# Altium PCB ZynQRF.PcbDoc (part 2 of 2)
Units mm, origin at the board's own origin, x right, y up, seen from the top; angles counter-clockwise.
Board outline 152.4 x 101.6 mm, 6 copper layers (Top Layer, Int1 (GND), Int2 (Sign), Int3 (Sign), Int4 (PWR), Bottom Layer), stack 1.551 mm thick; 211 components, 269 nets, 1177 pads, 225 vias.
Unrouted connection lines stored in the file: 758.
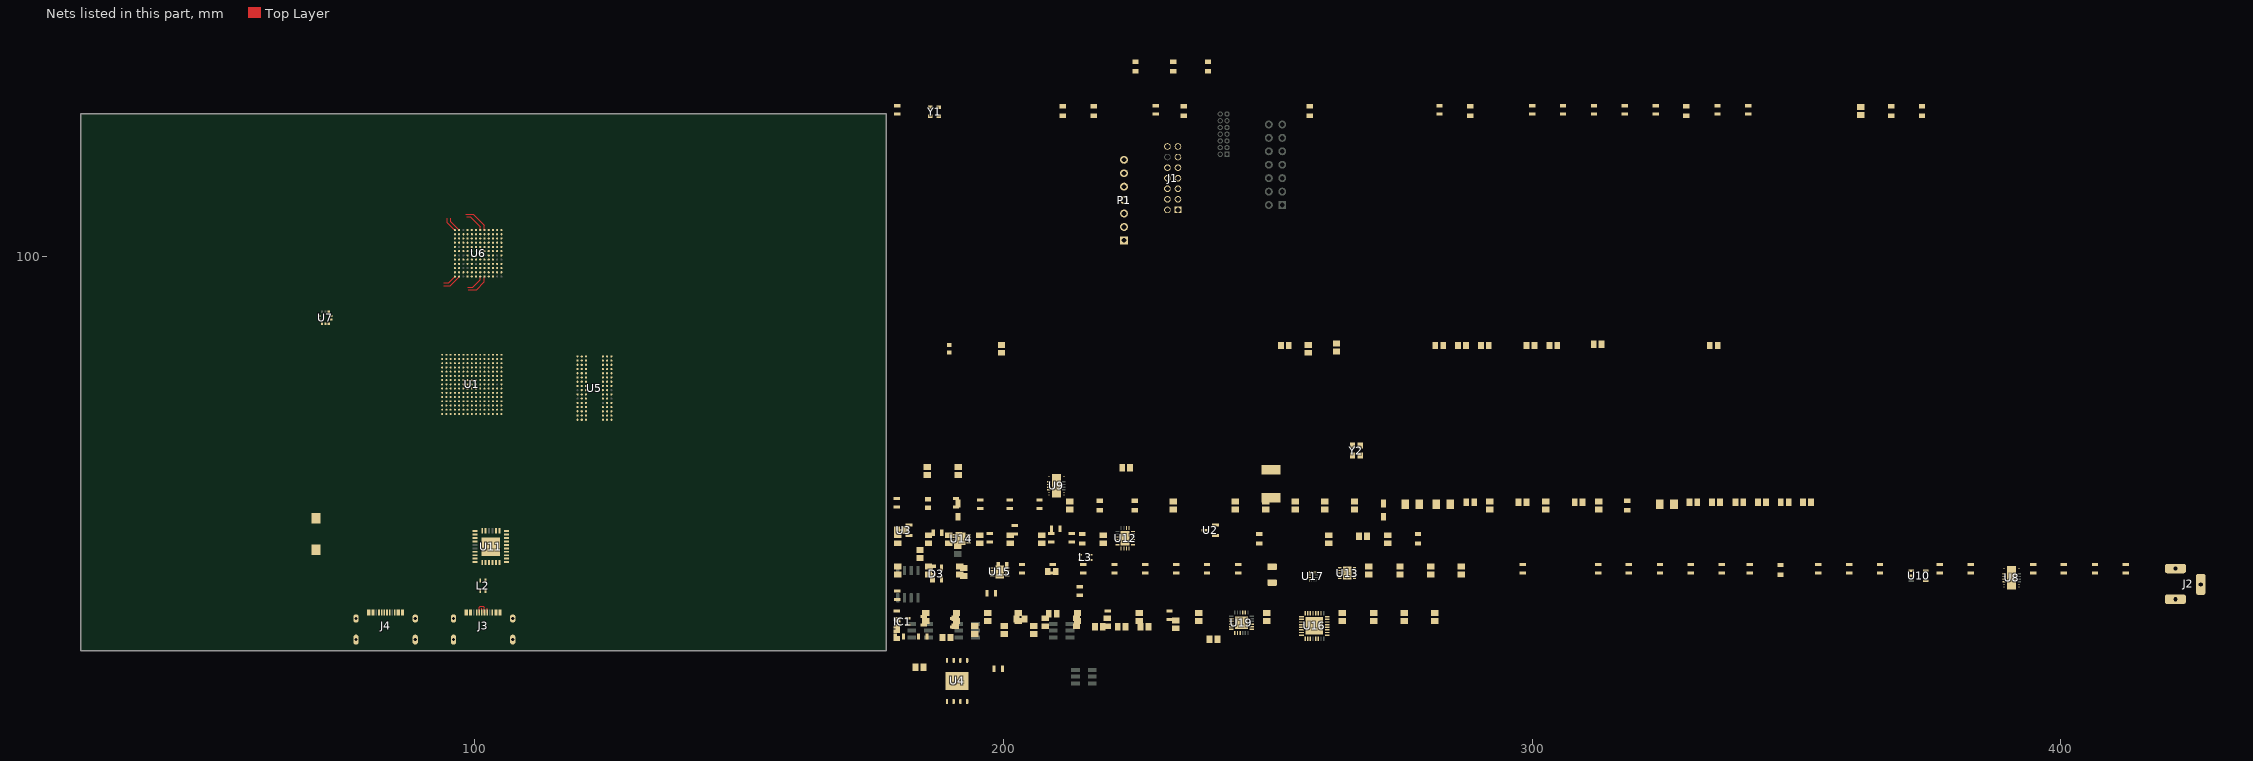
[diagram p4: the nets of this part, all layers, seen from the top]

## Part data
C1 C2 C3 C4 C5 C6 C8 C9 C10 C11 C12 C13 C16 C17 C18 C19 C20 C21 C22 C23 C24 C25 C26 C27 C28 C29 C31 C32 C33 C34 C35 C36 C37 C38 C39 C40 C43 C51 C52 C54 C55 C56 C57 C58 C59 C62 C65 C69 C70 C71 C72 C73 C74 C75 C76 C77 C78 C79 C80 C81 C82 C83 C84 C85 C86 C87 C88 C89: "Polarized Capacitor (Surface Mount)", LatestRevisionDate=29-May-2009, LatestRevisionNote="IPC-7351 Footprint Added.", PackageDescription="Chip Capacitor", PackageReference=C0805, Published=8-Jun-2000, Publisher="Altium Limited"
C7 C14 C15: "100 ÂµF Â±20% 10V Ceramic Capacitor X5R 1206 (3216 Metric)", Package="3216 TDK", Check_prices=https://www.snapeda.com/parts/C3216X5R1A107M160AC/TDK/view-part/?ref=eda, Digi-Key_Part_Number=445-6007-1-ND, MF=TDK, MP=C3216X5R1A107M160AC, Purchase-URL=https://pricing.snapeda.com/search/part/C3216X5R1A107M160AC/?ref=eda, SnapEDA_Link=https://www.snapeda.com/parts/C3216X5R1A107M160AC/TDK/view-part/?ref=snap
C30 C41 C44 C45 C46 C47 C48 C49 C50 C60 C61 C63 C64 C66 C67 C68: library part "Cap Pol3", "Polarized Capacitor (Surface Mount)", LatestRevisionDate=29-May-2009, LatestRevisionNote="IPC-7351 Footprint Added.", PackageDescription="Chip Capacitor", PackageReference=C0805, Published=8-Jun-2000, Publisher="Altium Limited"
C42 C53: library part "Cap Semi", "Capacitor (Semiconductor SIM Model)", LatestRevisionDate=29-May-2009, LatestRevisionNote="IPC-7351 Footprint Added.", PackageDescription="Chip Capacitor", PackageReference=C1206, Published=8-Jun-2000, Publisher="Altium Limited"
D1 D2 J1 J3 J4 U19 Y1: Package=None, Availability=Unavailable, Price=None
  D1 D2: MP=LTST-S220TBKT
  J1: MP=MTMM-107-03-G-D-190
  J3 J4: MF="{'manufacturer': u'Same Sky'}", MP=UJ20-C-H-C-MSMT-TR
  U19: MP=CP2102N-A02-GQFN24R
  Y1: MP=ASDMB-33.000MHZ-LY-T
D3: "ESD Suppressor TVS Uni-Dir 5.5V 4-Pin SOT-143 T/R", Package=None, Availability="In Stock", Check_prices=https://www.snapeda.com/parts/SP0503BAHTG/Ersa/view-part/?ref=eda, MF=Littelfuse, MP=SP0503BAHTG, Price=None, Purchase-URL=https://pricing.snapeda.com/search/part/SP0503BAHTG/?ref=eda, SnapEDA_Link=https://www.snapeda.com/parts/SP0503BAHTG/Ersa/view-part/?ref=snap
F1: "No Description Available", Mfr_Name=Belfuse
IC1: "Buffer, Non-Inverting 1 Element 1 Bit per Element 3-State Output 5-TSSOP", Package=None, Check_prices=https://www.snapeda.com/parts/74LVC1G126GW,125/Nexperia/view-part/?ref=eda, MF="Nexperia USA Inc.", MP=74LVC1G126GW,125, SnapEDA_Link=https://www.snapeda.com/parts/74LVC1G126GW,125/Nexperia/view-part/?ref=snap
J2: "WR-DC DC Power Jack Connector, Male, Right Angled, 24V, 5A", Manufacturer="Wurth Elektronik", Operating Temperature Max=85°C, Operating Temperature Min=-40°C, Rated Current=5A, Working Voltage=24V, Category="DC Power Jack Connector", ComponentLink1Description="Website Link", ComponentLink1URL=https://www.we-online.com/redexpert/article/694108301002?ad, ComponentLink2Description="Datasheet Link", ComponentLink2URL=https://www.we-online.com/redexpert/spec/694108301002?ad, Gender=Male, Manufacturer Part Number=694108301002, Match Code=WR-DC, Mount="Through Hole", Opening Diameter=6.4mm, Orientation="Right Angled", Packaging=Bag, Plug Inner Diameter=2.55mm, Plug Outer Diameter=5.5mm
L1: library part 7447789004, "WE-PD SMT Power Inductor, size 7332R, 4.7uH, 2.9A, 39mOhm", Case/Size Code=7332R, DC Resistance=33mOhm, DC Resistance Max=39mOhm, Inductance=4.7uH, Manufacturer="Wurth Elektronik", Operating Temperature Max=125°C, Operating Temperature Min=-40°C, Rated Current=2.9A, Saturation Current=3.9A, Self Resonant Frequency=45MHz, Category="Power Inductors", ComponentLink1Description="Website Link", ComponentLink1URL=https://www.we-online.com/redexpert/article/7447789004?ad, ComponentLink2Description="Datasheet Link", ComponentLink2URL=https://www.we-online.com/redexpert/spec/7447789004?ad, Height=3.2mm, Length=7.3mm, Manufacturer Part Number=7447789004, Match Code=WE-PD, Mount="Surface Mount", Packaging="Tape and Reel", Type=Robust, Width=7.3mm
L2 L3: "No Description Available", Mfr_Name=Murata
P1: "Header, 7-Pin", LatestRevisionDate=17-Jul-2002, LatestRevisionNote="Re-released for DXP Platform.", Publisher="Altium Limited"
P_1: "Header, 7-Pin, Dual row, Right Angle", LatestRevisionDate=17-Jul-2002, LatestRevisionNote="Re-released for DXP Platform.", Publisher="Altium Limited"
P__1: "Header, 7-Pin, Dual row", LatestRevisionDate=17-Jul-2002, LatestRevisionNote="Re-released for DXP Platform.", Publisher="Altium Limited"
R1 R2 R3 R4 R5 R6 R7 R8 R9 R10 R11 R12 R13 R14 R15 R16 R17 R18 R19 R20 R21 R22 R23 R24 R25 R26 R27 R28 R29 R30 R31 R32 R33 R34 R35 R36 R37 R38 R39 R40 R41 R42 R43 R44 R45 R46 R47 R48 R49 R50 R51 R52 R53 R54 R56 R57 R58 R59 R60 R61 R62 R63 R64: library part Res1_1, "Resistor", Manufacturer="Generic Components", Class I=Passive, Class II=Resistor, Published=8-Jun-2000, Publisher="Altium Limited", REF FARNELL 0603 SMD=612-595, REF FARNELL 1206 SMD 1K=912475, REF FARNELL 1206 SMD 10K=912591, REF FARNELL 1206 SMD 510R=4387065, Revision="July-2002: Re-released for DXP Platform."
R55: "1206 SMT PPTC", Package="1206 Bel Fuse", Availability=Unavailable, MF="Bel Fuse", MP=0ZCJ0050AF2E, Price=None, SnapEDA_Link=https://www.snapeda.com/parts/0ZCJ0050AF2E/Bel%20Fuse%20Inc./view-part/1301170/?ref=snap
T1 T2 T3 T4: "RF Transformer", Package=None, Availability=Unavailable, MF=Mini-Circuits, MP=TCM1-63AX+, Price=None, SnapEDA_Link=https://www.snapeda.com/parts/TCM1-63AX%2B/Mini-Circuits/view-part/1737112/?ref=snap
U1: "Dual ARMÂ® CortexÂ®-A9 MPCoreâ„¢ with CoreSightâ„¢ System On Chip _SOC_ IC ZynqÂ®-7000 Artixâ„¢-7 FPGA, 28K Logic Cells 667MHz 225-CSPBGA _13x13_", Package="CSPBGA-225 Xilinx", Availability=Unavailable, MF="Xilinx Inc.", MP=XC7Z010-1CLG225I, Price=None, SnapEDA_Link=https://www.snapeda.com/parts/XC7Z010-1CLG225I/Xilinx%20Inc./view-part/1219501/?ref=snap
U2 U3: "No Description Available", Mfr_Name=onsemi, RefDes=RefDes, Type=Type
U4: "FLASH - NOR Memory IC 256Mb (32M x 8) SPI - Quad I/O 133 MHz 8-WSON (8x6)", Package="WSON-8 Winbond", Availability="In Stock", Check_prices=https://www.snapeda.com/parts/W25Q256JVEIQ%20TR/Winbond+Electronics/view-part/?ref=eda, MF=Winbond, MP="W25Q256JVEIQ TR", Price=None, Purchase-URL="https://pricing.snapeda.com/search/part/W25Q256JVEIQ TR/?ref=eda", SnapEDA_Link=https://www.snapeda.com/parts/W25Q256JVEIQ%20TR/Winbond+Electronics/view-part/?ref=snap
U5: "SDRAM - DDR3L Memory IC 4Gb _256M x 16_ Parallel 800MHz 13.75ns 96-FBGA _9x14_", Package="FBGA-96 Micron", Digi-Key_Part_Number=MT41K256M16HA-125:E-ND, Digi-Key_Purchase_URL=https://www.digikey.vn/product-detail/en/micron-technology-inc/MT41K256M16HA-125:E/MT41K256M16HA-125:E-ND/4251401?utm_source=snapeda&utm_medium=aggregator&utm_campaign=symbol, MF="Micron Technology", MP=MT41K256M16HA-125:E, SnapEDA_Link=https://www.snapeda.com/parts/MT41K256M16HA-125%3AE/Micron%20Technology%20Inc./view-part/78724/?ref=snap
U6 U8 U9: "No Description Available", Mfr_Name="Analog Devices Inc", RefDes=RefDes
  U6: Type=RF
  U8 U9: Type="Power Management"
U7 U11: "No Description Available", Mfr_Name="Monolithic Power Systems", RefDes=RefDes, Type=Type
U10: "No Description Available", Mfr_Name="Diodes Inc", RefDes=RefDes, Type=Type
U12: "No Description Available", Mfr_Name="Texas Instruments", RefDes=RefDes, Type="Power Management"
U13: "3A Sink/Source DDR Termination Regulator w/ VTTREF Buffered Reference for DDR2, DDR3, DDR3L and DDR4 10-VSON -40 to 85", Package="VSON-10 Texas Instruments", Arrow_Electronics-Purchase-URL=https://snapeda.com/shop?store=Arrow+Electronics&id=256320, Availability=Good, DigiKey-Purchase-URL=https://snapeda.com/shop?store=DigiKey&id=256320, MF="Texas Instruments", Mouser-Purchase-URL=https://snapeda.com/shop?store=Mouser&id=256320, MP=TPS51200DRCT, Price=None, SnapEDA_Link=https://www.snapeda.com/parts/TPS51200DRCT/Texas%20Instruments/view-part/256320/?ref=snap, Texas_Instruments-Purchase-URL=https://snapeda.com/shop?store=Texas+Instruments&id=256320
U14 U15: "6.5 V, 500 mA, Ultralow Noise, High PSRR, Fast Transient Response CMOS LDO", Package="LFCSP -8 Analog Devices", Check_prices=https://www.snapeda.com/parts/ADM7170ACPZ-1.3-R7/Analog+Devices/view-part/?ref=eda, MF="Analog Devices", MP=ADM7170ACPZ-1.3-R7, SnapEDA_Link=https://www.snapeda.com/parts/ADM7170ACPZ-1.3-R7/Analog+Devices/view-part/?ref=snap
U16: "Microchip USB3320C-EZK-TR, USB Transceiver, USB 2.0, 1.8 V, 3.3 V, 32-Pin QFN", Package="QFN-32 Microchip", Check_prices=https://www.snapeda.com/parts/USB3320C-EZK-TR/Microchip/view-part/?ref=eda, MF=Microchip, MP=USB3320C-EZK-TR, SnapEDA_Link=https://www.snapeda.com/parts/USB3320C-EZK-TR/Microchip/view-part/?ref=snap
U17: library part TUSB320IRWBR, "USB Type-C configuration channel logic and port control", Package="X2QFN-12 Texas Instruments", Check_prices=https://www.snapeda.com/parts/TUSB320IRWBR/Texas+Instruments/view-part/?ref=eda, MF="Texas Instruments", MP=TUSB320IRWBR, SnapEDA_Link=https://www.snapeda.com/parts/TUSB320IRWBR/Texas+Instruments/view-part/?ref=snap
U18: "1/1 Transceiver Half CANbus 8-SO", Package="SO-8 NXP Semiconductors", Availability="In Stock", Check_prices=https://www.snapeda.com/parts/TJA1050T/CM,118/NXP%20USA%20Inc./view-part/304529/?ref=eda, MF="NXP USA", MP=TJA1050T/CM,118, Price=None, Purchase-URL=https://pricing.snapeda.com/search/part/TJA1050T/CM,118/?ref=eda, SnapEDA_Link=https://www.snapeda.com/parts/TJA1050T/CM,118/NXP%20USA%20Inc./view-part/304529/?ref=snap
Y2: "Oscillator MEMS 24MHz Â±20ppm (Stability) 15pF HCMOS/LVCMOS 55% 1.8V 4-Pin PQFN SMD T/R", Package=None, Check_prices=https://www.snapeda.com/parts/SIT1602BI-11-18E-24.000000G/SiTime/view-part/?ref=eda, MF=SiTime, MP=SIT1602BI-11-18E-24.000000G, SnapEDA_Link=https://www.snapeda.com/parts/SIT1602BI-11-18E-24.000000G/SiTime/view-part/?ref=snap

## Via types
v1: diameter 0.45, hole 0.2, Top Layer to Bottom Layer, tented both sides, 225 vias

## Nets (pads, with @x,y where several pads share a name; then routed paths per layer and width w, separated by ;. In a path a pad name is that pad's centre, name@x,y a point inside that pad or via, vN(x,y) a via of type N, cw(c..) or ccw(c..) an arc to the next point about the centre after c; other vN are vias at no path point)
1.8V_PHY_VDD: C69.1 C70.1 C71.1 C72.1 C78.1 C89.1 FB13.1 IC1.5 R62.1 R63.2 U16.28 U16.30 U16.32 U19.5 Y2.1 Y2.4
1P3_TX1A: U6.M9 U6.M10
1P3_TX2A: U6.A9 U6.A10
3.3V_PHY_VDD: FB14.1 R49.1
5V: C35.1 C74.1 C75.1 C76.1 C81.1 C82.1 D1.A D2.A F1.2 U10.5 U16.21 U17.12 U19.7
AD9363_AUXDAC1: U6.B3
AD9363_AUXDAC2: U6.C3
AD9363_GPO_0: U6.B7
AD9363_GPO_1: U6.B6
AD9363_GPO_2: U6.B5
AD9363_GPO_3: U6.B4
CONTROL&CLOCKS.IO_02_34_AD9361_RST: U1.P9 U6.K5
CONTROL&CLOCKS.IO_L01_34_FB_CLK: U1.P10 U6.F10
CONTROL&CLOCKS.IO_L08_34_CTRL_OUT0: U1.L15 U6.D4
CONTROL&CLOCKS.IO_L08_34_CTRL_OUT1: U1.M15 U6.E4
CONTROL&CLOCKS.IO_L09_34_TX_FRAME: U1.L14 U6.G9
CONTROL&CLOCKS.IO_L10_34_EN_AGC: U1.L13 U6.G5
CONTROL&CLOCKS.IO_L11_34_ENABLE: U1.K12 U6.G6
CONTROL&CLOCKS.IO_L11_34_TXNRX: U1.K11 U6.H4
CONTROL&CLOCKS.IO_L13_34_CTRL_OUT2: U1.N11 U6.E5
CONTROL&CLOCKS.IO_L13_34_CTRL_OUT3: U1.N12 U6.E6
CONTROL&CLOCKS.IO_L21_34_CTRL_OUT4: U1.M10 U6.F6
CONTROL&CLOCKS.IO_L21_34_CTRL_OUT5: U1.M11 U6.F5
CONTROL&CLOCKS.IO_L22_34_CTRL_OUT6: U1.N7 U6.F4
CONTROL&CLOCKS.IO_L22_34_CTRL_OUT7: U1.N8 U6.G4
CTRL_IN0: U1.F13 U6.C5
CTRL_IN1: U1.F14 U6.C6
CTRL_IN2: U1.G15 U6.D6
CTRL_IN3: U1.F15 U6.D5
DDR_A0: U1.P1 U5.N3
DDR_A1: U1.N1 U5.P7
DDR_A2: U1.M1 U5.P3
DDR_A3: U1.M4 U5.N2
DDR_A4: U1.P3 U5.P8
DDR_A5: U1.P4 U5.P2
DDR_A6: U1.P5 U5.R8
DDR_A7: U1.M5 U5.R2
DDR_A8: U1.P6 U5.T8
DDR_A9: U1.N4 U5.R3
DDR_A10: U1.J1 U5.L7
DDR_A11: U1.L2 U5.R7
DDR_A12: U1.M2 U5.N7
DDR_A13: U1.K2 U5.T3
DDR_A14: U1.K1 U5.T7
DDR_BA0: U1.M6 U5.M2
DDR_BA1: U1.R1 U5.N8
DDR_BA2: U1.N6 U5.M3
DDR_CASn: U1.R5 U5.K3
DDR_CKE: U1.L3 U5.K9
DDR_CLKN: U1.N2 U5.K7
DDR_CLKP: U1.N3 U5.J7
DDR_CSn: U1.R2 U5.L2
DDR_DQ0: U1.D4 U5.E3
DDR_DQ1: U1.A2 U5.F7
DDR_DQ2: U1.C4 U5.F2
DDR_DQ3: U1.C1 U5.F8
DDR_DQ4: U1.B4 U5.H3
DDR_DQ5: U1.A4 U5.H8
DDR_DQ6: U1.C3 U5.G2
DDR_DQ7: U1.A3 U5.H7
DDR_DQ8: U1.E1 U5.D7
DDR_DQ9: U1.D1 U5.C3
DDR_DQ10: U1.E2 U5.C8
DDR_DQ11: U1.E3 U5.C2
DDR_DQ12: U1.F3 U5.A7
DDR_DQ13: U1.G1 U5.A2
DDR_DQ14: U1.H1 U5.B8
DDR_DQ15: U1.H2 U5.A3
DDR_DQM0: U1.B1 U5.E7
DDR_DQM1: U1.D3 U5.D3
DDR_DQSN0: U1.B2 U5.G3
DDR_DQSN1: U1.F2 U5.B7
DDR_DQSP0: U1.C2 U5.F3
DDR_DQSP1: U1.G2 U5.C7
DDR_ODT: U1.K3 U5.K1
DDR_RASn: U1.R6 U5.J3
DDR_RESETn: R21.1 U1.L4 U5.T2
DDR_WEn: U1.R3 U5.L3
DDR_ZQ0: R20.1 U5.L8
EN2: R33.2 R38.1 U9.6
EN/UVLO: R39.2 R40.1 U12.14
EN_DAT_USB: R32.2 R37.1 U8.6
EN_POW_USB: R29.2 R32.1 U8.3
EXT: R30.2 R33.1 U9.3
GND: C1.2 C2.2 C3.2 C4.2 C5.2 C6.2 C7.1 C8.2 C9.2 C10.2 C11.2 C12.2 C13.2 C14.1 C15.1 C20.2 C21.2 C22.2 C23.2 C24.2 C25.2 C26.2 C27.2 C28.2 C29.2 C30.2 C31.2 C32.2 C33.2 C34.2 C35.2 C36.2 C37.2 C38.2 C39.2 C40.2 C41.2 C42.2 C43.1 C44.2 C45.2 C46.2 C47.2 C48.2 C49.2 C50.2 C51.2 C52.2 C53.2 C54.2 C55.2 C56.2 C57.2 C58.2 C59.2 C60.2 C61.2 C62.2 C63.2 C64.2 C65.2 C66.2 C67.2 C68.2 C69.2 C70.2 C71.2 C72.2 C73.2 C74.2 C75.2 C76.2 C77.2 C78.2 C79.2 C80.2 C81.2 C82.2 C83.2 C84.2 C85.2 C86.2 C88.2 C89.2 D3.1 FB10.1 FB18.1 IC1.3 J1.01 J1.03 J1.05 J1.07 J1.09 J1.11 J1.13 J2.2 J2.3 J3.A1_B12 J3.A12_B1 J3.SH1 J3.SH2 J3.SH3 J3.SH4 L3.4 P1.6 R11.1 R12.1 R20.2 R21.2 R22.1 R24.1 R26.2 R27.2 R34.1 R35.2 R36.2 R37.2 R38.2 R41.2 R43.2 R44.2 R48.1 R51.2 R58.1 R59.1 R60.1 R61.1 U1.A1 U1.A11 U1.B8 U1.C5 U1.C15 U1.D2 U1.D12 U1.E5 U1.E7 U1.E8 U1.E9 U1.F10 U1.G3 U1.G5 U1.G13 U1.H6 U1.H8 U1.H10 U1.J5 U1.J9 U1.K4 U1.K7 U1.K10 U1.K14 U1.L1 U1.L5 U1.L11 U1.M8 U1.N5 U1.N15 U1.P2 U1.P12 U1.R9 U2.2 U3.2 U4.4 U4.9 U5.A9 U5.B1 U5.B3 U5.B9 U5.D1 U5.D8 U5.E1 U5.E2 U5.E8 U5.F9 U5.G1 U5.G8 U5.G9 U5.J2 U5.J8 U5.M1 U5.M9 U5.P1 U5.P9 U5.T1 U5.T9 U6.A4 U6.A5 U6.A6 U6.A12 U6.B1 U6.B2 U6.B12 U6.C1 U6.C2 U6.C4 U6.C7 U6.C8 U6.C9 U6.C10 U6.C11 U6.C12 U6.D1 U6.D12 U6.E1 U6.F1 U6.F3 U6.F7 U6.F9 U6.F11 U6.G1 U6.G10 U6.G12 U6.H1 U6.H2 U6.H3 U6.H5 U6.H6 U6.H7 U6.H9 U6.H10 U6.J1 U6.J2 U6.K1 U6.K2 U6.K12 U6.L1 U6.L2 U6.L3 U6.L7 U6.L8 U6.L9 U6.L10 U6.L11 U6.L12 U6.M4 U6.M5 U6.M6 U7.3 U7.4 U7.8 U8.17 U9.17 U10.2 U11.2 U11.5 U11.7 U11.10 U11.13 U11.16 U11.17 U11.20 U11.21 U11.27 U11.30 U11.33 U12.16 U12.21 U13.4 U13.8 U13.11 U14.6 U14.9 U15.6 U15.9 U16.33 U17.10 U17.11 U19.2 U19.25 Y1.2 Y2.2
IO_02_34_AD9361_CLKOUT: U1.P8
IO_L07_34_RX_FRAME: U1.N13
IO_L12_MRCC_34_DATA_CLK: U1.L12
IO_L23_35_SPI_CLK: U1.E11 U6.J5
IO_L23_35_SPI_ENB: U1.E12 U6.K6 | length 0
IO_L24_35_SPI_DI: U1.E13 U6.J4
IO_L24_35_SPI_DO: U1.F12 U6.L6
LED_RX: U19.13
LED_TX: U19.14
NetC16_2: C16.2 C17.2 FB10.2 U1.F6 U1.F8 U1.G8 U1.H7 U1.J7
NetC18_2: C18.2 C19.2
NetC27_1: C27.1 U6.L5
NetC43_2: C43.2 U12.18
NetC53_1: C53.1 R42.2 R44.1 U11.19
NetC56_1: C56.1 R46.2 U13.7
NetC63_1: C63.1 U14.4
NetC68_1: C68.1 U15.4
NetC73_1: C73.1 U16.20
NetC79_1: C79.1 C80.1 R53.2 U19.6
NetC83_1: C83.1 R53.1 U19.9
NetC86_1: C86.1 FB16.1 FB17.2 L3.1
NetC88_1: C88.1 FB17.1 R55.1
NetD1_C: D1.C R1.2
NetD2_C: D2.C R19.2
NetD3_2: D3.2 R54.1 R58.2 U19.8
NetF1_1: F1.1 U9.9 U9.10 U9.15 U9.16
NetIC1_2: IC1.2 R62.2 U19.21
NetIC1_4: IC1.4 R63.1 R64.2
NetJ3_A5: J3.A5 U17.1
NetJ3_B5: J3.B5 U17.2
NetJ4_A5: J4.A5 R59.2
NetJ4_B5: J4.B5 R61.2
NetR1_1: R1.1 U2.3
NetR2_1: R2.1 U1.D5
NetR8_1: R8.1 U1.K6
NetR9_1: R9.1 R11.2 R12.2 U1.G7
NetR10_1: R10.1
NetR13_2: R13.2 U1.C9
NetR16_1: R16.1 R17.1
NetR19_1: R19.1 U3.3
NetR22_2: R22.2 U1.H3
NetR23_2: R23.2 U1.J3
NetR24_2: R24.2 U6.L4
NetR25_1: R25.1 U7.6
NetR26_1: R26.1 U8.4
NetR27_1: R27.1 U9.4
NetR31_1: R31.1 R34.2 U7.7
NetR35_1: R35.1 U8.5
NetR36_1: R36.1 U9.5
NetR43_1: R43.1 U12.17
NetR45_2: R45.2 U13.9
NetR50_2: R50.2 U17.3
NetR51_1: R51.1 U16.24
NetR52_1: R52.1 Y2.3
NetR56_2: R56.2 U19.3
NetR57_2: R57.2 U19.4
NetU1_M7: U1.M7 U2.1
OUTA: C37.1 C38.1 C40.1 U8.9 U8.10 U8.15 U8.16 U9.7 U9.8
OVP: R40.2 R41.1 U12.15
PG_MPM54304: U11.26 U14.5 U15.5
PGND: C87.2 FB18.2 J4.A1_B12 J4.A12_B1 J4.SH1 J4.SH2 J4.SH3 J4.SH4 L3.3
PL_GPIO0: U1.K13
PL_GPIO1: U1.M12
PL_GPIO2: U1.R10
PL_GPIO3: U1.N14
PL_GPIO4: U1.M14
PS-SRST#: R14.2 U1.B11
PS_CLK_500: R15.1 R15.2 U1.C7 Y1.3
PS_GPIO0: U1.D8
PS_GPIO1: U1.B10
PS_GPIO2: U1.D6
PS_GPIO3: U1.B5
PS_GPIO4: U1.C13
PS_GPIO5: U1.D13
PS_GPIO6: U1.B12
PS_MIO07_500_USB_RESET_B: R18.2 U1.A12 U16.27
PS_MIO28_501_USB0_D4: U1.A15 U16.7
PS_MIO29_501_USB0_DIR: U1.D11 U16.31
PS_MIO30_501_USB0_STP: U1.B15 U16.29
PS_MIO31_501_USB0_NXT: U1.C12 U16.2
PS_MIO32_501_USB0_D0: U1.E15 U16.3
PS_MIO33_501_USB0_D1: U1.C11 U16.4
PS_MIO34_501_USB0_D2: U1.D15 U16.5
PS_MIO35_501_USB0_D3: U1.A14 U16.6
PS_MIO36_501_USB0_CLK: U1.B14 U16.1
PS_MIO37_501_USB0_D5: U1.C14 U16.9
PS_MIO38_501_USB0_D6: U1.A13 U16.10
PS_MIO39_501_USB0_D7: U1.D14 U16.13
QSP0I_D0: U1.A8 U4.5
QSP0I_D1: U1.A7 U4.2
QSP0I_D2: U1.C8 U4.3
QSP0I_D3: U1.A9 U4.7
QSP0I_SCK: U1.A10 U4.6
QSPI0_CS0: U1.A5 U4.1
RX1A_N: U6.M2 | length 3.6
  Top Layer w0.15: 94.1,94.5 95.3,94.5 U6.M2@97,96.2
RX1A_P: U6.M1 | length 2.6
  Top Layer w0.15: 94.1,95 95,95 U6.M1@96.2,96.2
RX2A_N: U6.A1 | length 2.8
  Top Layer w0.15: 94.8,107.2 94.8,106.4 U6.A1@96.2,105
RX2A_P: U6.A2 | length 2.9
  Top Layer w0.15: 95.4,107.2 95.4,106.6 U6.A2@97,105
RX_D0_N: U6.K11
RX_D0_P: U1.J13 U6.J12
RX_D1_N: U1.G14 U6.K10
RX_D1_P: U1.H13 U6.J11
RX_D2_N: U1.G12 U6.K9
RX_D2_P: U1.H12 U6.J10
RX_D3_N: U1.G11 U6.K8
RX_D3_P: U1.J14 U6.J9
RX_D4_N: U1.J15 U6.K7
RX_D4_P: U1.K15 U6.J8
RX_D5_N: U1.H11 U6.J7
RX_D5_P: U1.J11 U6.H8
SRST: J1.14 P1.7 R3.1 R10.2
Standby: Y1.1
TCK: J1.06 P1.3 R6.1 U1.G9
TDI: J1.10 P1.5 R4.1 U1.L7
TDO: J1.08 P1.4 R5.1 U1.L8
TMS: J1.04 P1.2 R7.1 U1.L9
TX1A_N: U6.M8 | length 4.7
  Top Layer w0.15: 98.7,93.7 100.3,93.7 101.8,95.2 U6.M8@101.8,96.2
TX1A_P: U6.M7 | length 3.6
  Top Layer w0.15: 98.6,94.2 99.6,94.2 101,95.6 U6.M7@101,96.2
TX2A_N: U6.A7 | length 4
  Top Layer w0.15: 98.4,107.5 99.1,107.5 101,105.6 U6.A7@101,105
TX2A_P: U6.A8 | length 5.3
  Top Layer w0.15: 98.3,108 99.7,108 101.8,105.9 U6.A8@101.8,105
TX_D0_N: U1.P15 U6.E12
TX_D0_P: U1.R13 U6.D11
TX_D1_N: U1.R15 U6.E11
TX_D1_P: U1.P11 U6.D10
TX_D2_N: U1.R11 U6.E10
TX_D2_P: U1.R12 U6.D9
TX_D3_N: U1.P14 U6.E9
TX_D3_P: U1.P13 U6.D8
TX_D4_N: U1.N9 U6.E8
TX_D4_P: U1.M9 U6.D7
TX_D5_N: U1.R8 U6.F8
TX_D5_P: U1.R7 U6.E7
TX_VCO_1P1V_SUPPLY: U6.A11 U6.B11
UART_RX@ZYNQ: R64.1 U1.C6
UART_TX@ZYNQ: U1.B7 U19.20
"USB PHY.USB_OTG_CPEN": U10.4 U16.17
"USB PHY.USB_VBUS_OTG": R28.1 U16.22
USB_FS_SLEEP: IC1.1 R60.2 U19.15
USB_ID: R49.2 U16.23 U17.9
USB_OTG_90_OHM_N: J3.A7 J3.B7 L2.1 | length 3.2
  Top Layer w0.15: J3.B7@100.8,32.6 100.8,33.6 101,33.8 101.6,33.8 101.8,33.6 J3.A7@101.8,32.6
USB_OTG_90_OHM_P: J3.A6 J3.B6 L2.4 | length 1.6
  Top Layer w0.15: J3.A6@101.3,32.6 101.3,33.4 ; J3.B6@102.3,32.6 102.3,33.4
USB_OTG_N: L2.2 U16.19
USB_OTG_P: L2.3 U16.18
USB_PHY_VDDIO: C77.1 FB15.2 U16.8 U16.11 U16.14
USB_PHY_XI: R52.2 U16.26
USB_UART_N: C84.1 D3.4 J4.A7 J4.B7 R57.1
USB_UART_P: C85.1 D3.3 J4.A6 J4.B6 R56.1
USB_VBUS: C32.1 C33.1 C34.1 C39.1 FB12.1 R28.2 R39.1 U8.7 U8.8 U10.1 U12.9 U12.10 U12.11 U12.12 U12.13
USB_VBUS_DEBUG: C87.1 FB16.2 J4.A4_B9 J4.A9_B4 L3.2
USR_BTN: U1.B9
USR_LED: U1.D10 U3.1
VCC_0_PL: U1.G4 U1.H4 U1.J4
VCC_AUX: C1.1 C2.1 C4.1 FB1.1 U1.H9 U1.J6 U1.J8 U1.K9 U1.L6
VCC_INT: C3.1 C5.1 C6.1 C7.2 C8.1 C9.1 C10.1 C11.1 C15.2 C49.1 C50.1 U1.E10 U1.F9 U1.G6 U1.G10 U1.H5 U1.J10 U1.K5 U1.L10 U11.14 U11.15 U11.18
VCC_MPM: C42.1 U11.25
VCC_PLL: C18.1 C19.1 FB3.1
VCCP_AUX: C12.1 C13.1 C14.2 FB2.1
VCCP_PLL: U1.F5
VDD_0.75V: C62.1 R47.2 R48.2 U13.1
VDD_1.5V: C48.1 C64.1 C65.1 R23.1 R47.1 U1.B3 U1.E4 U1.F1 U1.J2 U1.M3 U1.R4 U5.A1 U5.A8 U5.B2 U5.C1 U5.C9 U5.D2 U5.D9 U5.E9 U5.F1 U5.G7 U5.H2 U5.H9 U5.K2 U5.K8 U5.N1 U5.N9 U5.R1 U5.R9 U11.22 U11.23 U11.24 U13.2
VDD_1.8V: C20.1 C41.1 FB1.2 FB2.2 FB3.2 FB4.2 FB5.2 FB6.2 FB7.2 FB8.2 FB9.2 FB11.2 FB13.2 R46.1 U1.E6 U11.1 U11.31 U11.32
VDD_3.3V: C46.1 C47.1 C54.1 C61.1 C67.1 FB14.2 R45.1 U4.8 U11.6 U11.8 U11.9 U13.10 U14.7 U14.8 U15.7 U15.8
VDD_12V: J2.1 L1.1
VDD_12V_FILTERED: C31.1 C44.1 C45.1 C51.1 C52.1 L1.2 R42.1 U7.1 U7.2 U11.28 U11.29 U12.3 U12.4 U12.5 U12.6 U12.7 U12.8
VDD_DDR_VREF: C25.1 C26.1 C55.1 U1.F4 U5.H1 U5.M8 U13.6
VDD_DDR_VTT: C57.1 C58.1 C59.1 U13.3 U13.5
VDD_GPO: U6.B8
VDDA_BB: C60.1 U14.1 U14.2 U14.3
VDDA_RX_LO: U6.F2
VDDA_RX_SYNTH: C66.1 U15.1 U15.2 U15.3
VDDA_RX_TX: U6.D2 U6.D3 U6.E3
VDDA_TX_LO: U6.B9 U6.B10
VDDD_DIG: U6.F12
VDDIO_34_PL: FB8.1 U1.J12 U1.M13 U1.N10 U1.P7 U1.R14
VDDIO_35_PL: FB9.1 U1.F11 U1.H15
VDDIO_500_PS: C24.1 FB6.1 R13.1 U1.A6 U1.D7 Y1.4
VDDIO_501_PS: FB4.1 FB11.1 FB15.1 R14.1 R18.1 U1.B13 U1.C10 U1.E14
VIN_5V_EXT_PLUG: C29.1 C30.1 R25.2 R30.1 R31.2 U7.5 U9.1 U9.2
VIN_5V_USB_DATA: C36.1 FB12.2 J3.A4_B9 J3.A9_B4 R50.1
VIN_5V_USB_POWER: C28.1 R29.1 R54.2 R55.2 U8.1 U8.2
VMODE_0: R16.2 U1.D9
VMODE_1: R17.2 U1.B6
VREF: C22.1 FB7.1 J1.02 P1.1 R2.2 R3.2 R4.2 R5.2 R6.2 R7.2 R8.2 U1.K8
XADC_VCC: C16.1 C17.1 C21.1 FB5.1 R9.2 U1.F7
pads on no net: C23.1 J1.12 J3.A8 J3.B8 J4.A8 J4.B8 P_1.1 P_1.2 P_1.3 P_1.4 P_1.5 P_1.6 P_1.7 P_1.8 P_1.9 P_1.10 P_1.11 P_1.12 P_1.13 P_1.14 P__1.1 P__1.2 P__1.3 P__1.4 P__1.5 P__1.6 P__1.7 P__1.8 P__1.9 P__1.10 P__1.11 P__1.12 P__1.13 P__1.14 T1.1 T1.2 T1.3 T1.4 T1.5 T1.6 T2.1 T2.2 T2.3 T2.4 T2.5 T2.6 T3.1 T3.2 T3.3 T3.4 T3.5 T3.6 T4.1 T4.2 T4.3 T4.4 T4.5 T4.6 U1.H14 U5.J1 U5.J9 U5.L1 U5.L9 U5.M7 U6.A3 U6.E2 U6.G2 U6.G3 U6.G7 U6.G8 U6.G11 U6.H11 U6.H12 U6.J3 U6.J6 U6.K3 U6.K4 U6.M3 U6.M11 U6.M12 U7.9 U7.10 U8.11 U8.12 U8.13 U8.14 U9.11 U9.12 U9.13 U9.14 U10.3 U11.3 U11.4 U11.11 U11.12 U12.1 U12.2 U12.19 U12.20 U13.12 U13.13 U13.14 U13.15 U16.12 U16.15 U16.16 U16.25 U17.4 U17.5 U17.6 U17.7 U17.8 U18.1 U18.2 U18.3 U18.4 U18.5 U18.6 U18.7 U18.8 U19.1 U19.10 U19.11 U19.12 U19.16 U19.17 U19.18 U19.19 U19.22 U19.23 U19.24
copper on no net: | length 1.1
  Top Layer w0.15: v1(103,102.2) 103.4,102.6
  Top Layer w0.2: v1(103.8,102.2) 104.2,101.8
  other v1: 95,71.4 95.8,71.4 96.6,71.4 97.4,71.4 98.2,71.4 99,71.4 99.8,71.4 100.6,71.4 101.4,71.4 102.2,71.4 103,71.4 103.8,71.4 95,72.2 95.8,72.2 96.6,72.2 97.4,72.2 98.2,72.2 99,72.2 99.8,72.2 100.6,72.2 101.4,72.2 102.2,72.2 103,72.2 103.8,72.2 95,73 95.8,73 96.6,73 97.4,73 98.2,73 99,73 99.8,73 100.6,73 101.4,73 102.2,73 103,73 103.8,73 95,73.8 95.8,73.8 96.6,73.8 97.4,73.8 98.2,73.8 99,73.8 99.8,73.8 100.6,73.8 101.4,73.8 102.2,73.8 103,73.8 103.8,73.8 95,74.6 95.8,74.6 96.6,74.6 97.4,74.6 98.2,74.6 99,74.6 99.8,74.6 100.6,74.6 101.4,74.6 102.2,74.6 103,74.6 103.8,74.6 95,75.4 95.8,75.4 96.6,75.4 97.4,75.4 98.2,75.4 99,75.4 99.8,75.4 100.6,75.4 101.4,75.4 102.2,75.4 103,75.4 103.8,75.4 95,76.2 95.8,76.2 96.6,76.2 97.4,76.2 98.2,76.2 99,76.2 99.8,76.2 100.6,76.2 101.4,76.2 102.2,76.2 103,76.2 103.8,76.2 95,77 95.8,77 96.6,77 97.4,77 98.2,77 99,77 99.8,77 100.6,77 101.4,77 102.2,77 103,77 103.8,77 95,77.8 95.8,77.8 96.6,77.8 97.4,77.8 98.2,77.8 99,77.8 99.8,77.8 100.6,77.8 101.4,77.8 102.2,77.8 103,77.8 103.8,77.8 95,78.6 95.8,78.6 96.6,78.6 97.4,78.6 98.2,78.6 99,78.6 99.8,78.6 100.6,78.6 101.4,78.6 102.2,78.6 103,78.6 103.8,78.6 95,79.4 95.8,79.4 96.6,79.4 97.4,79.4 98.2,79.4 99,79.4 99.8,79.4 100.6,79.4 101.4,79.4 102.2,79.4 103,79.4 103.8,79.4 95,80.2 95.8,80.2 96.6,80.2 97.4,80.2 98.2,80.2 99,80.2 99.8,80.2 100.6,80.2 101.4,80.2 102.2,80.2 103,80.2 103.8,80.2 97.4,97.4 98.2,97.4 99,97.4 99.8,97.4 100.6,97.4 101.4,97.4 102.2,97.4 103,97.4 103.8,97.4 97.4,98.2 98.2,98.2 99,98.2 99.8,98.2 100.6,98.2 101.4,98.2 102.2,98.2 103,98.2 103.8,98.2 97.4,99 98.2,99 99,99 99.8,99 100.6,99 101.4,99 102.2,99 103,99 103.8,99 97.4,99.8 98.2,99.8 99,99.8 99.8,99.8 100.6,99.8 101.4,99.8 102.2,99.8 103,99.8 103.8,99.8 97.4,100.6 98.2,100.6 99,100.6 99.8,100.6 100.6,100.6 101.4,100.6 102.2,100.6 103,100.6 103.8,100.6 97.4,101.4 98.2,101.4 99,101.4 99.8,101.4 100.6,101.4 101.4,101.4 102.2,101.4 103,101.4 103.8,101.4 97.4,102.2 98.2,102.2 99,102.2 99.8,102.2 100.6,102.2 101.4,102.2 102.2,102.2 97.4,103 98.2,103 99,103 99.8,103 100.6,103 101.4,103 102.2,103 103,103 103.8,103 97.4,103.8 98.2,103.8 99,103.8 99.8,103.8 100.6,103.8 101.4,103.8 102.2,103.8 103,103.8 103.8,103.8

## Polygon pours and split planes (outlines as drawn)
no net on Int1 (GND) (split plane): 443 vertices, not listed, extent 25.91,25.91 177.29,126.49
no net on Int4 (PWR) (split plane): 443 vertices, not listed, extent 25.91,25.91 177.29,126.49

## Text inside footprints (layer, text, board x,y; h text height)
J3: Mechanical 13 "PCB EDGE" at 108.05,25.75 h1.02
J4: Mechanical 13 "PCB EDGE" at 89.6,25.75 h1.02
P_1: Top Overlay "14" at 250.698,127 h1.27 r90; Top Overlay "13" at 253.238,127 h1.27 r90; Top Overlay "1" at 253.238,107.188 h1.27 r90; Top Overlay "2" at 250.698,107.188 h1.27 r90
P__1: Top Overlay "1" at 242.778,117.62 h1 r90; Top Overlay "13" at 242.778,128.32 h1 r90
U2: Top Overlay "REFDES" at 239.735,45.977 h1.27 r90; Mechanical 13 "RefDes2" at 239.735,45.977 h1.27 r90
U3: Top Overlay "REFDES" at 181.735,45.977 h1.27 r90; Mechanical 13 "RefDes2" at 181.735,45.977 h1.27 r90
U6: Top Overlay "12" at 105.635,106.29 h1.27 r90; Top Overlay "1" at 96.835,106.29 h1.27 r90; Top Overlay "M" at 94.275,95.565 h1.27; Top Overlay "A" at 94.275,104.365 h1.27; Mechanical 13 "12" at 105.635,106.29 h1.27 r90; Mechanical 13 "1" at 96.835,106.29 h1.27 r90; Mechanical 13 "M" at 94.275,95.565 h1.27; Mechanical 13 "A" at 94.275,104.365 h1.27; Bottom Overlay "12" at 104.365,106.29 h1.27 r270; Bottom Overlay "1" at 95.565,106.29 h1.27 r270; Bottom Overlay "M" at 94.91,95.565 h1.27; Bottom Overlay "A" at 94.91,104.365 h1.27
U7: Top Overlay "*" at 69.414,88.415 h1.27; Mechanical 13 "*" at 70.506,88.415 h1.27
U10: Top Overlay "*" at 371.175,40.923 h1.27; Mechanical 13 "*" at 372.186,39.831 h1.27
U11: Top Overlay "*" at 104.315,49.532 h1.27 r270; Mechanical 13 "*" at 104.315,47.907 h1.27 r270
U12: Top Overlay "*" at 220.193,47.565 h1.27; Mechanical 13 "*" at 221.59,47.565 h1.27